# EAGLE board RGB (EAGLE 6.5.0)
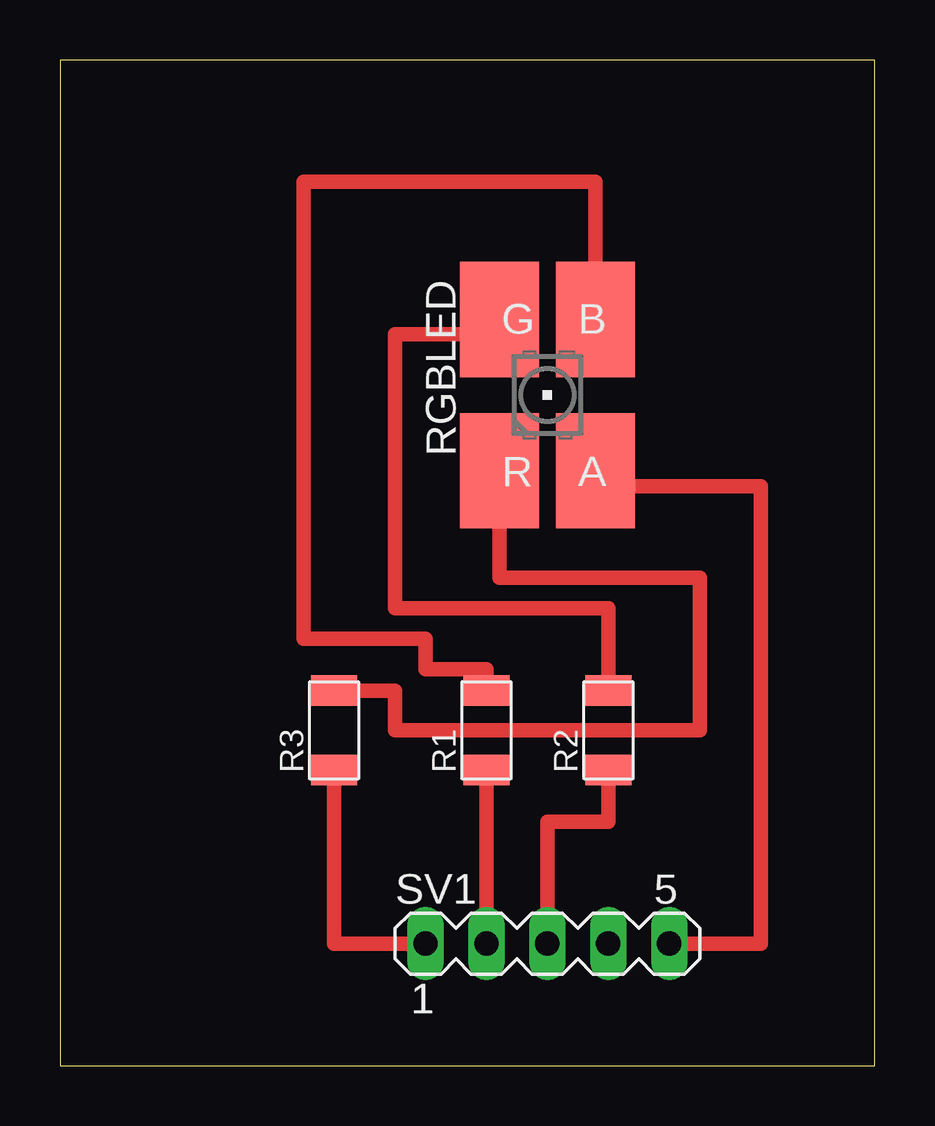
[diagram p0: board, top side]

Size 33.96 x 41.9 mm. Coordinates in mm from the lower left corner, seen from the top.
Outline: 0,0 33.96,0 33.96,41.9 0,41.9 0,0
Copper layers (1*16): Top 0.035mm / dielectric 1.5mm / Bottom 0.035mm
Design rules "default": minimum track width 10mil, minimum drill 24mil, track to track 8mil, track to pad 8mil, pad to pad 8mil, via to via 8mil, smd to smd 8mil, copper to edge 40mil, drill to drill 8mil, minimum pad ring 10mil, minimum via ring 8mil, stop-mask expansion 4mil, vias tented up to drill 0mil, thermal gap 10mil

## Footprints (pad centres in the part's own frame; a part is rotated, then mirrored left to right if it is on the bottom)
R1206FAB = smd 1.27 x 1.905: 1 -1.651,0; 2 1.651,0
P-LCC-4 = smd 3.3 x 4.8: A 2,-3.15; B 2,3.15; G -2,3.15; R -2,-3.15
MA05-1 = drill 1.016 long: 1 -5.08,0; 2 -2.54,0; 3 0,0; 4 2.54,0; 5 5.08,0

## Placement (x,y rotation side)
R1  10K  [R1206FAB]  17.78,13.97 90 top
R2  10K  [R1206FAB]  22.86,13.97 90 top
R3  499ohm  [R1206FAB]  11.43,13.97 90 top
RGBLED  LEDRGBNEW  [P-LCC-4]  20.32,27.94 0 top
SV1  [MA05-1]  20.32,5.08 0 top

## Library data of the parts
R1-R3 RGBLED = fab
SV1 = con-lstb; OC_FARNELL: unknown; OC_NEWARK: unknown

## Nets
N$1: RGBLED.A SV1.5
N$2: R3.2 RGBLED.R
N$3: R3.1 SV1.1
N$4: R1.2 RGBLED.B
N$5: R1.1 SV1.2
N$6: R2.2 RGBLED.G
N$7: R2.1 SV1.3

## Tracks (layer width: path | path; a pad name or v marks a point on that pad's centre or on a via)
N$1
  Top 0.61: SV1.5 29.21,5.08 29.21,24.13 22.32,24.13 RGBLED.A
N$2
  Top 0.61: R3.2 13.97,15.62 13.97,13.97 26.67,13.97 26.67,20.32 18.32,20.32 RGBLED.R
N$3
  Top 0.61: SV1.1 11.43,5.08 R3.1
N$4
  Top 0.61: R1.2 17.78,16.51 15.24,16.51 15.24,17.78 10.16,17.78 10.16,36.83 22.32,36.83 RGBLED.B
N$5
  Top 0.61: SV1.2 R1.1
N$6
  Top 0.61: R2.2 22.86,19.05 13.97,19.05 13.97,30.48 18.32,30.48 RGBLED.G
N$7
  Top 0.61: SV1.3 20.32,10.16 22.86,10.16 R2.1